# Altium PCB 12-6v.PcbDoc
Units mm, origin at the board's own origin, x right, y up, seen from the top; angles counter-clockwise.
Board outline 38.48 x 29.59 mm, 2 copper layers (Top Layer, Bottom Layer); 5 components, 4 nets, 14 pads, 0 vias.
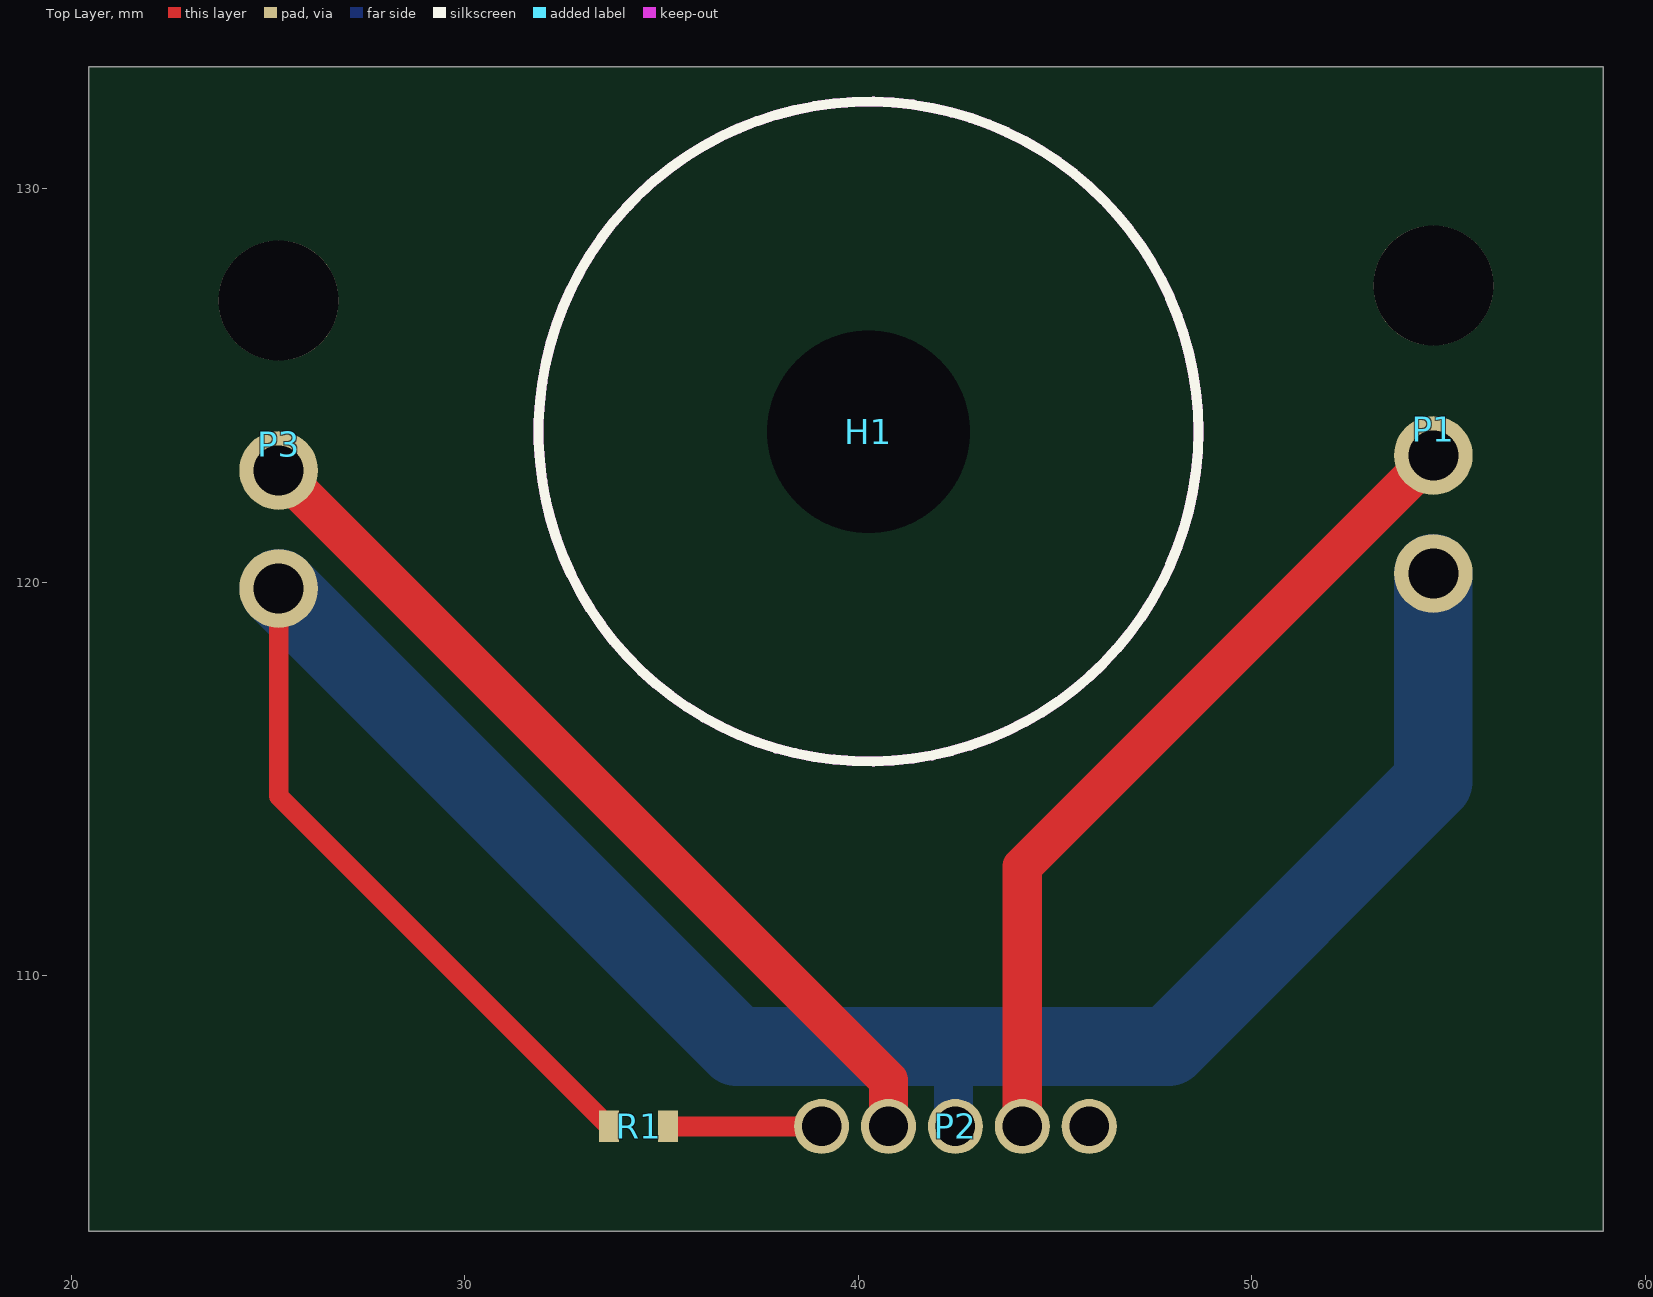
[diagram p0: Top Layer view]
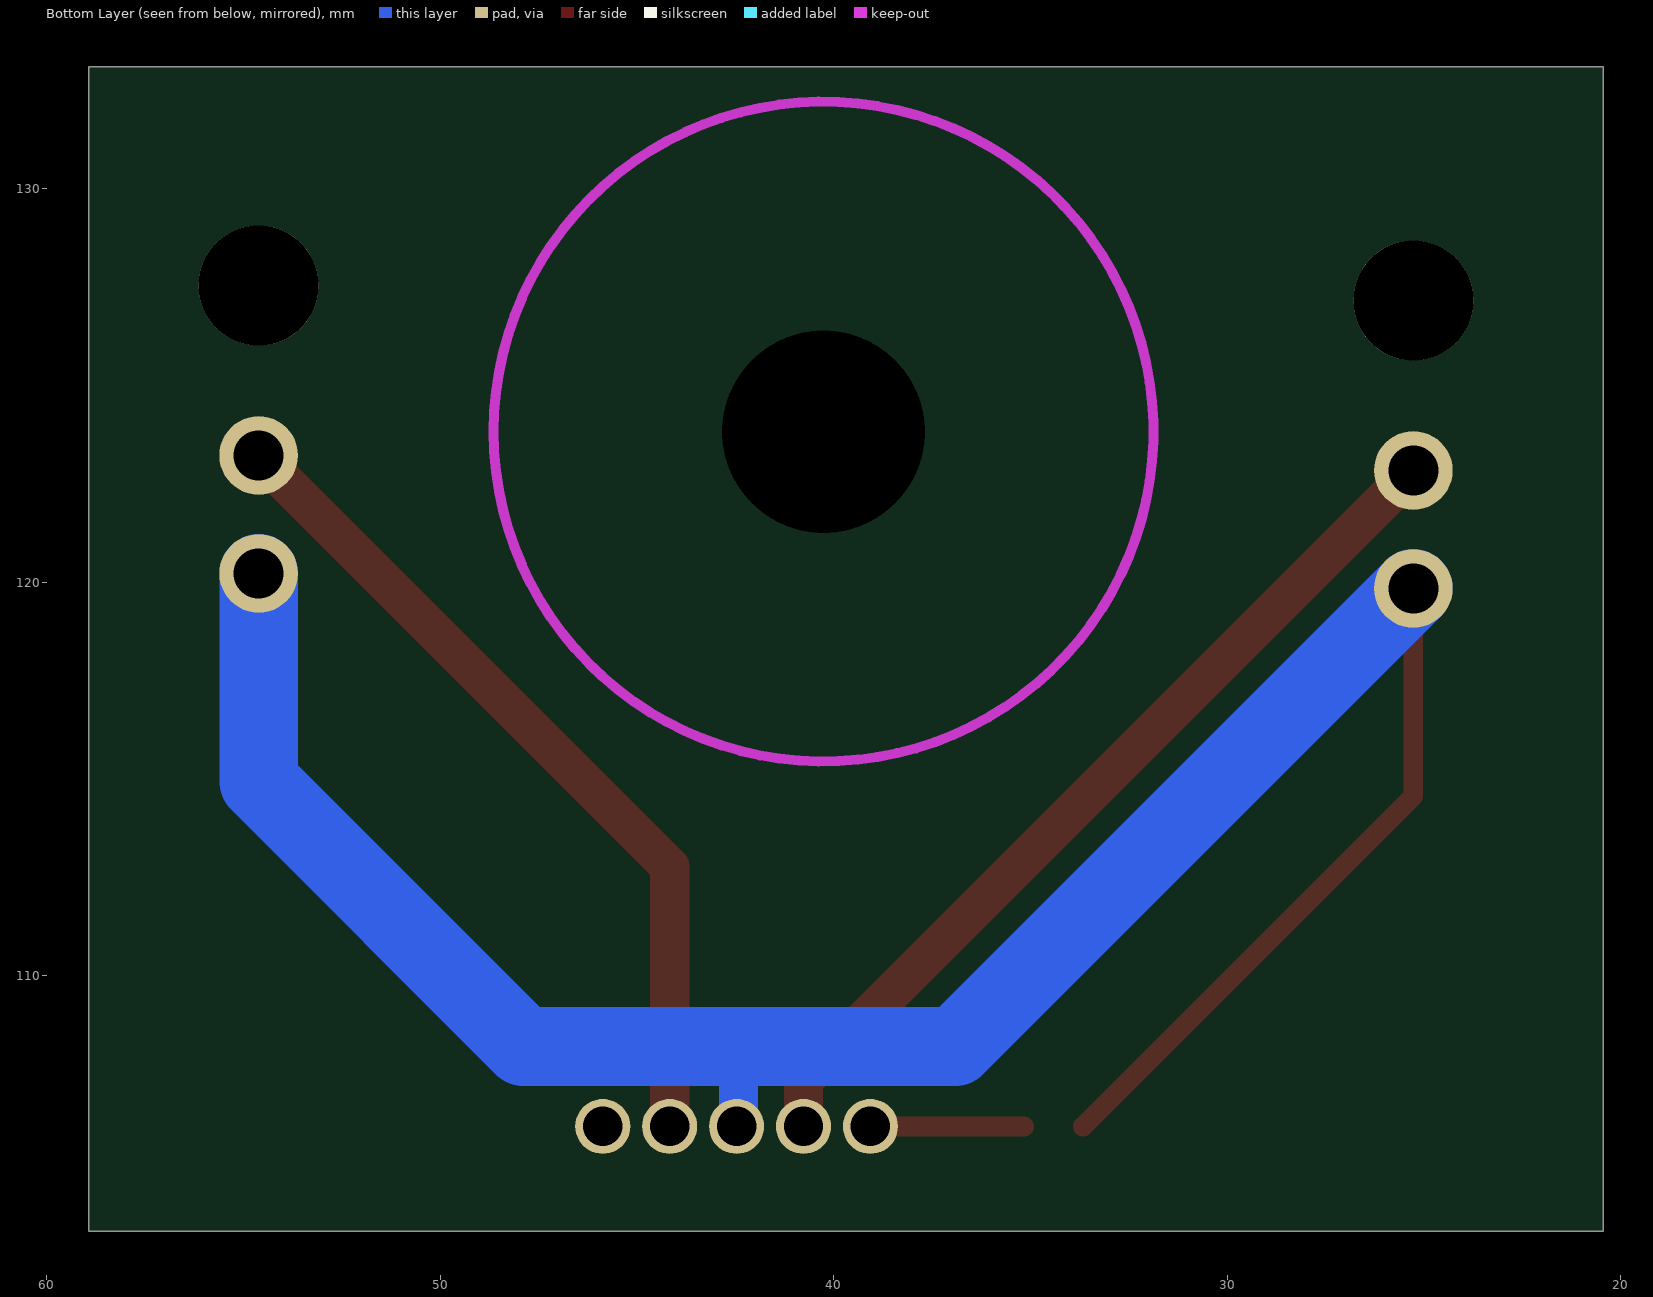
[diagram p1: Bottom Layer view, seen from below]

## Layer stack, top to bottom
Top Solder: solder mask 0.0102, Solder Resist, Dk 3.5
Top Layer: signal copper 0.0356
Dielectric 1: dielectric 0.32, FR-4, Dk 4.8
Bottom Layer: signal copper 0.0356
Bottom Solder: solder mask 0.0102, Solder Resist, Dk 3.5

## Board outline
20.447,103.505 58.928,103.505 58.928,133.096 20.447,133.096

## Design rules (kind name [scope] priority, off if disabled: settings)
BoardOutlineClearance [All] p1: gap=0.3 ignorepadtopadclearanceinfootprint=FALSE
Clearance [All] p1: gap=0.152 ignorepadtopadclearanceinfootprint=FALSE except(0: Arc-Hole Track-Hole SMDPad-Hole THPad-Hole Via-Hole Fill-Hole Poly-Hole Region-Hole Text-Hole)
ComponentClearance [All] p1: gap=0.1 collisioncheckmode=3 verticalgap=0.254 showdistances=FALSE
FabricationTestPointUsage TestPointUsage [All] p1: valid=0 allowmultiple=FALSE
FabricationTestpoint Testpoint [All] p1: side=3 testpointundercomponent=TRUE minsize=1.016 maxsize=2.54 preferedsize=1.524 minholesize=0 maxholesize=1.016 preferedholesize=0.813 testpointgrid=0.025 allowsidetop=TRUE allowsidebottom=TRUE usegrid=TRUE gridtolerance=0
HoleSize [All] p1: absolutevalues=TRUE maxlimit=6.3 minlimit=0.3 maxpercent=80.000 minpercent=20.000
HoleToHoleClearance [All] p1: gap=0.45 allowstackedmicrovias=TRUE
MinimumAnnularRing [All] p1: minimumring=0.15
MinimumSolderMaskSliver [All] p1: minsoldermaskwidth=0.075
PlaneClearance [All] p1: clearance=0.5
PlaneConnect [All] p1: planeconnectstyle=Direct reliefexpansion=0.508 reliefentries=4 reliefconductorwidth=0.254 reliefairgap=0.254
PolygonConnect "GND Via" [isVia AND InNet('GND')] p1: connectstyle=Direct reliefconductorwidth=0.254 reliefentries=4 polygonreliefangle="90 Angle" airgapwidth=0.254 // GND Via Connection
PolygonConnect [All] p2: connectstyle=Relief reliefconductorwidth=0.254 reliefentries=4 polygonreliefangle="90 Angle" airgapwidth=0.25
RoutingVias [All] p1: holewidth=0.3 width=0.6 viastyle="Through Hole" minholewidth=0.3 minwidth=0.6 maxholewidth=6.3 maxwidth=6.6
SilkToSilkClearance [All] p1: silktosilkclearance=0.15
SilkToSolderMaskClearance SilkscreenOverComponentPads [IsPad] p1: minsilkscreentomaskgap=0.25 clearancetoexposedcopper=TRUE
SolderMaskExpansion [All] p1: expansion=0.1
Width [All] p1: maxlimit=2 minlimit=0.152 preferedwidth=0.25 minimp=50.000000 maximp=50.000000 favimp=50.000000
20 further rules are at their usual default settings.

## Components (designator, comment, footprint, x,y, rotation, side; value= is the part's Value field where it differs from the comment)
H1 "Hole M4" #10Hole 22.733,110.236 r0 top
P1 "SCH_MLX_1X2" PCB_MLX_MICROFIT_1X2 54.61,125.73 r180 top
P2 "5-Pin Vertical Header" "5-Pin Vertical Header" 42.467,106.172 r270 top
P3 "SCH_MLX_1X2" PCB_MLX_MICROFIT_1X2 25.273,125.349 r180 top
R1 "SCH_GENERIC_RESISTOR_0603" PCB_GENERIC_SMD_0603 34.417,106.172 r0 top

## Footprints (in the part's own frame and the unit in brackets; to place one, negate y for a bottom-side part, rotate by r counter-clockwise, add the part's x,y. Pads: shape width x height; smd on the part's side, far side on the other; paste and mask are expansions set on the pad)
"5-Pin Vertical Header" [mm]
  round 1.4 hole 1: 1(0,3.4) 2(0,1.7) 3(0,0) 4(0,-1.7) 5(0,-3.4)
#10Hole [mil]
  round 0 hole 202.76 unplated mask+78.74: 1(690,535)
  Keep-Out Layer circle w10: c690,535 r330
  silkscreen extent 360,205 1020,865
PCB_GENERIC_SMD_0603 [mm]
  rect 0.5x0.8 smd: 1(-0.75,0) 2(0.75,0)
  body extent -0.75,-0.5 0.75,0.5, height 0.45
PCB_MLX_MICROFIT_1X2 [mm]
  round 2 hole 1.27: 1(0,2.511) 2(0,5.508)
  round 3.048 hole 3.048 unplated: ""(0,-1.807)
  body extent -3.58,-6.52 3.58,5.72, height 8.77

## Part data
H1: library part #10Hole
P2: Manufacturer=Sullins, Manufacturer No.=PPPC041LFBN-RC
R1: "Generic SMD resistor 0603"

## Nets (pads, with @x,y where several pads share a name; then routed paths per layer and width w, separated by ;. In a path a pad name is that pad's centre, name@x,y a point inside that pad or via, vN(x,y) a via of type N, cw(c..) or ccw(c..) an arc to the next point about the centre after c; other vN are vias at no path point)
6V: P2.4 P3.1 | length 23.1
  Top Layer w1: P3.1 40.767,107.344 P2.4
12V: P1.1 P2.2 | length 21.4
  Top Layer w1: P2.2 44.167,112.776 P1.1
GND: P1.2 P2.3 P3.2 R1.1 | length 61.4
  Top Layer w0.5: P3.2 25.273,114.566 R1.1
  Bottom Layer w1: 42.418,108.204 42.418,106.221 P2.3
  Bottom Layer w2: P3.2 36.91,108.204 42.418,108.204 47.879,108.204 54.61,114.935 P1.2
NetP2_5: P2.5 R1.2 | length 3.9
  Top Layer w0.5: R1.2 P2.5
pads on no net: H1.1 P1. P2.1 P3.

## Polygon pours and split planes (outlines as drawn)
no net on Bottom Layer "Bottom Layer-No Net" (solid, pour order 2): 31.623,102.235

## Silkscreen, mask and mechanical layers (free items; w line width, h text height)
Mechanical 2:
  the board outline again, w0.254